# Altium PCB Ryu-Plate.PcbDoc
Units mil, origin at the board's own origin, x right, y up, seen from the top; angles counter-clockwise.
Board outline 6020 x 4528.86 mil, 2 copper layers (Top Layer, Bottom Layer); 34 components, 0 nets, 5 pads, 0 vias.
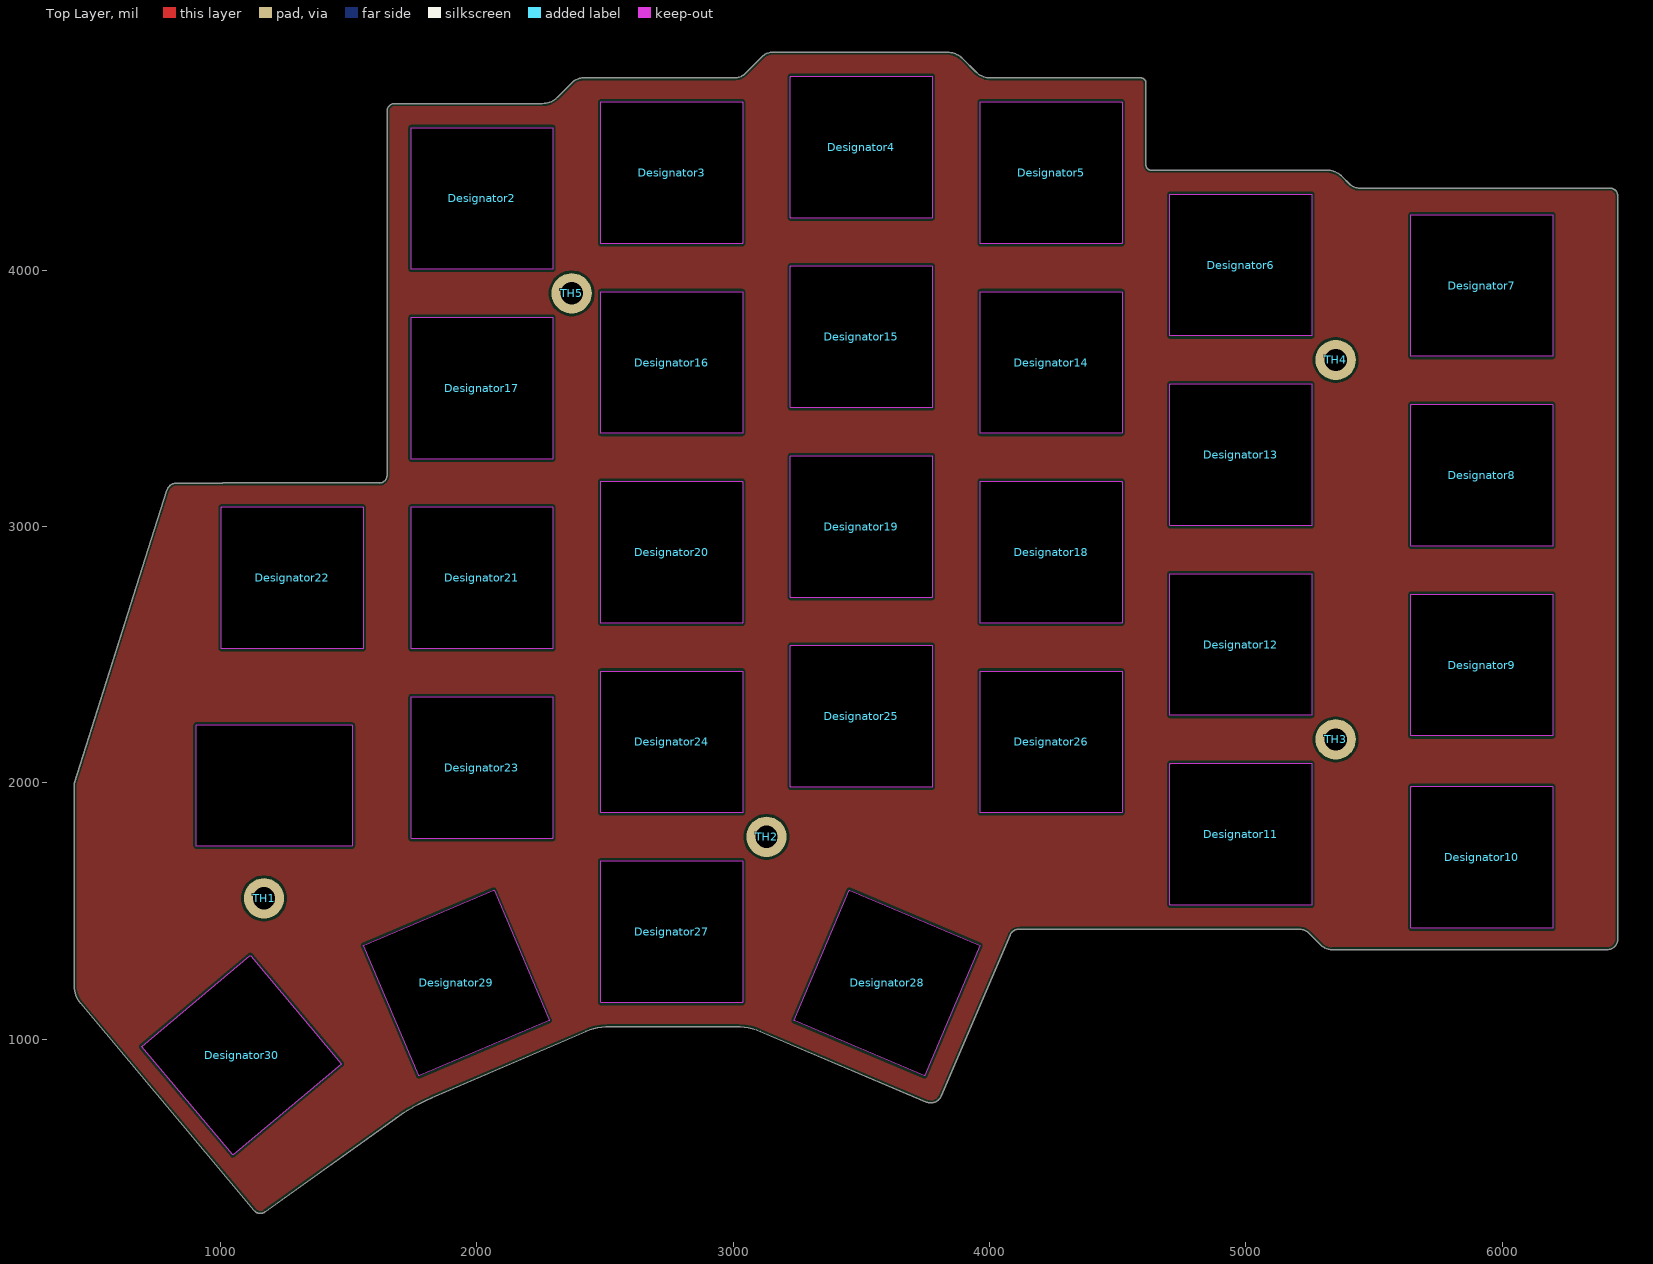
[diagram p0: Top Layer view]
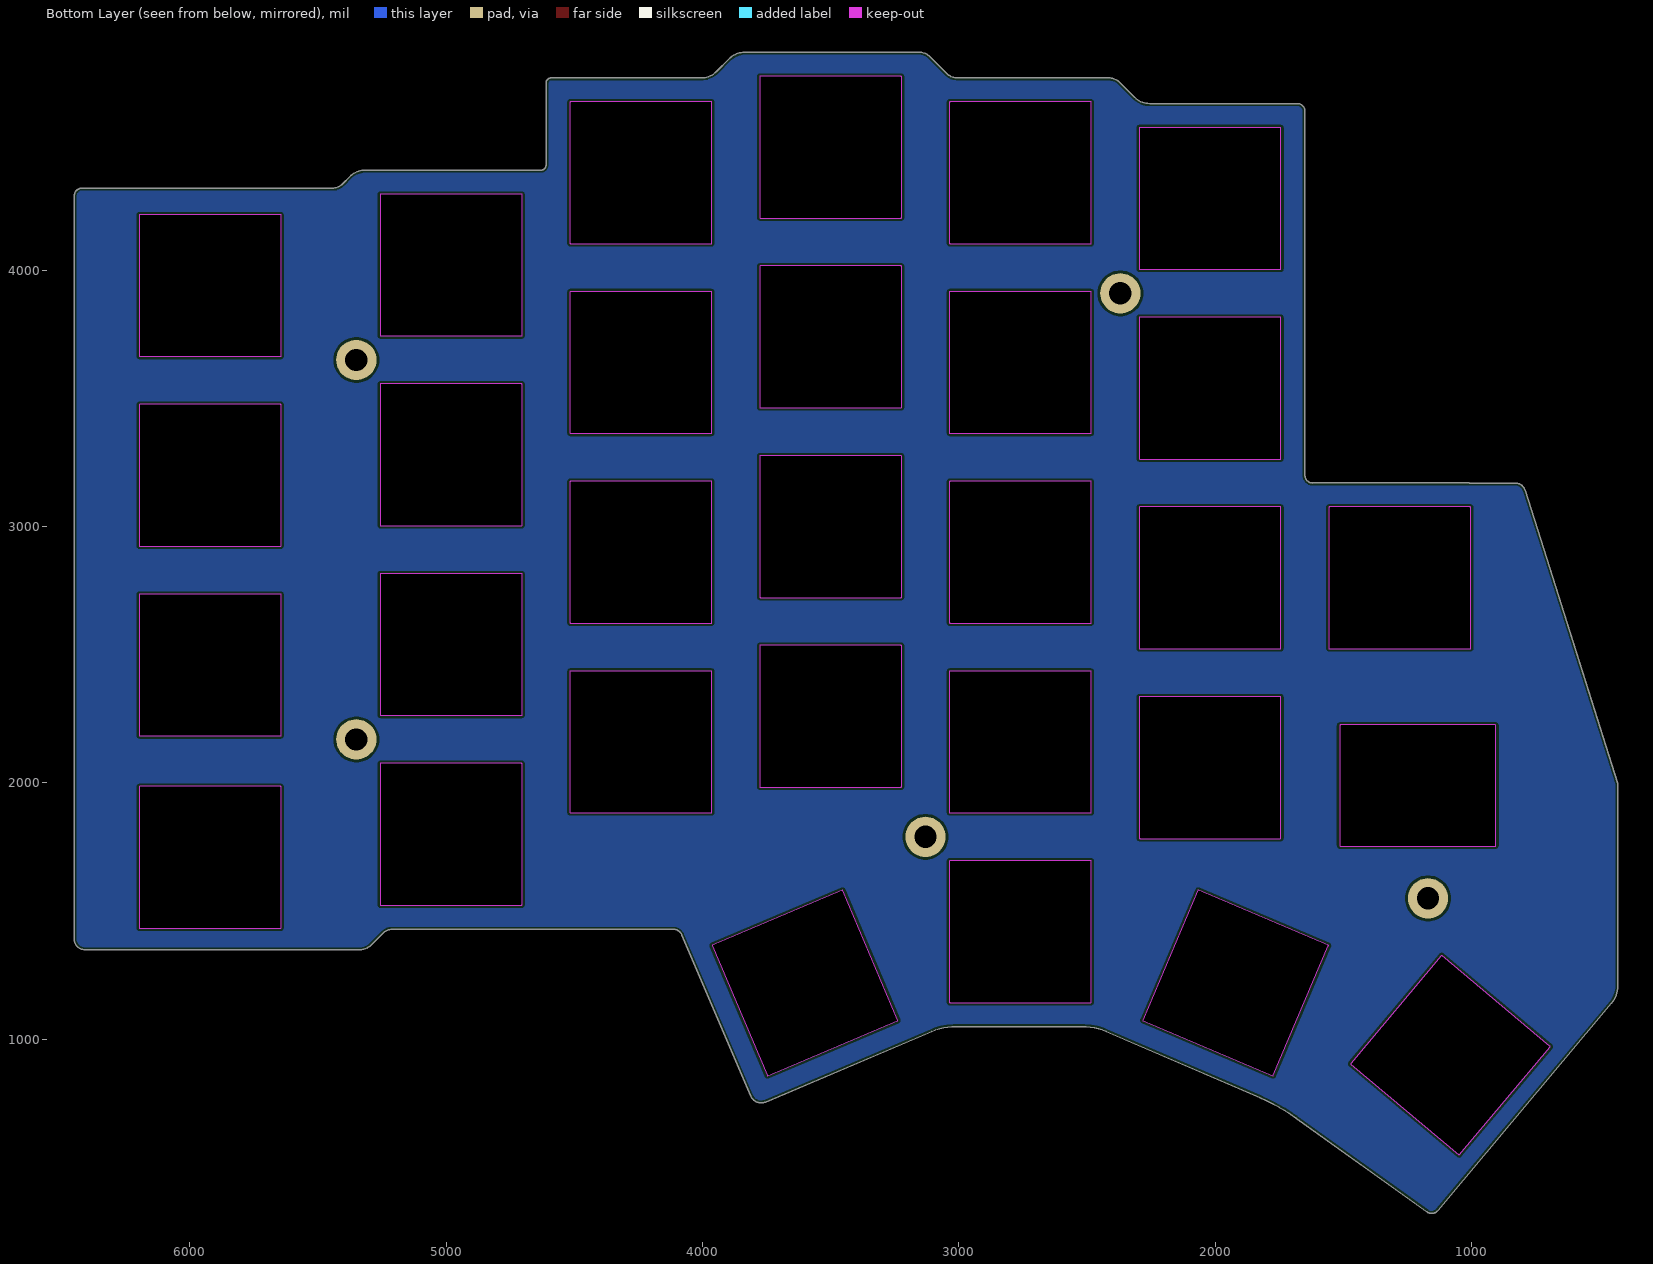
[diagram p1: Bottom Layer view, seen from below]

## Layer stack, top to bottom
Top Solder: solder mask 0.4, Solder Resist, Dk 3.5
Top Layer: signal copper 1.4
Dielectric 1: dielectric 12.6, FR-4, Dk 4.8
Bottom Layer: signal copper 1.4
Bottom Solder: solder mask 0.4, Solder Resist, Dk 3.5

## Board outline
1131.27,332.37 454.09,1141.23 cw(c533.27,1207.52) 430,1207.52 430,1893.38 430,1995.08 cw(c440,1995.03) 430.45,1998 719.24,2913.88 791.15,3141.56 cw(c830,3129.21) 830,3169.98 1008.6,3169.97 1009.29,3170.11 1622.54,3170.11 1620,3170 ccw(c1620,3200) 1650,3200 1650,3199.92 1650,4590 1650,4620 cw(c1680,4620) 1680,4650 2255.86,4650 ccw(c2255.86,4732.42) 2314.14,4674.14 2372.93,4732.93 cw(c2414.14,4691.72) 2414.14,4750 3005.86,4750 ccw(c3005.86,4808.28) 3047.07,4767.07 3112.93,4832.93 cw(c3154.14,4791.72) 3154.14,4850 3835.86,4850 cw(c3835.86,4767.59) 3894.14,4825.86 3945.86,4774.14 ccw(c4004.14,4832.43) 4004.14,4750 4590,4750 cw(c4590,4730) 4610,4730 4610,4410 ccw(c4630,4410) 4630,4390 5315.86,4390 cw(c5315.86,4307.6) 5374.14,4365.85 5374.14,4365.86 5402.93,4337.07 ccw(c5444.14,4378.29) 5444.14,4320 6420,4320 cw(c6420,4290) 6450,4290 6450,1390 cw(c6410,1389.99) 6410,1350 5334.14,1350 cw(c5334.14,1408.28) 5292.93,1367.07 5247.07,1412.93 ccw(c5205.88,1371.75) 5205.86,1430 4620,1430 4115.16,1430 ccw(c4115.16,1391.85) 4080.09,1406.87 3810.75,778.34 cw(c3770.71,795.49) 3753.67,755.4 3105.22,1030.8 ccw(c3010.87,808.65) 3010.87,1050 2518.51,1050 ccw(c2518.51,814.66) 2425.44,1030.81 2425.44,1030.82 1824.45,772.05 ccw(c2121.1,83.05) 1684.12,692.78 1173.72,327 cw(c1155.39,352.57)
cut-out: 1511.97,2226.22 cw(c1511.97,2223.19) 1515,2223.19 1515,1757.13 cw(c1511.65,1757.12) 1511.65,1753.78 907.64,1753.78 cw(c907.64,1756.65) 904.76,1756.65 904.76,2223.66 cw(c907.32,2223.66) 907.32,2226.22

## Design rules (kind name [scope] priority, off if disabled: settings)
BoardOutlineClearance [All] p1: gap=10 ignorepadtopadclearanceinfootprint=FALSE except(0: Arc-SplitContinuation Track-SplitContinuation SMDPad-SplitContinuation THPad-SplitContinuation Via-SplitContinuation Fill-SplitContinuation Poly-SplitContinuation Region-SplitContinuation Text-SplitContinuation)
Clearance [All] p1: gap=10 ignorepadtopadclearanceinfootprint=FALSE except(0: Arc-Hole Track-Hole SMDPad-Hole THPad-Hole Via-Hole Fill-Hole Poly-Hole Region-Hole Text-Hole)
PolygonConnect [All] p1: connectstyle=Relief reliefconductorwidth=10 reliefentries=4 polygonreliefangle="90 Angle" airgapwidth=10
RoutingVias [All] p1: holewidth=28 width=50 viastyle="Through Hole" minholewidth=28 minwidth=50 maxholewidth=28 maxwidth=50
SolderMaskExpansion [All] p1: expansion=4 istentingtop=FALSE
Width [All] p1: maxlimit=10 minlimit=10 preferedwidth=10
30 further rules are at their usual default settings.

## Classes and differential pairs
component class Ryu-Plate: TH1 TH4

## Components (designator, comment, footprint, x,y, rotation, side; value= is the part's Value field where it differs from the comment)
Designator2 "Comment" MX_cutout 2020,4280 r0 top
Designator3 "Comment" MX_cutout 2760,4380 r0 top
Designator4 "Comment" MX_cutout 3500,4480 r0 top
Designator5 "Comment" MX_cutout 4240,4380 r0 top
Designator6 "Comment" MX_cutout 4980,4020 r0 top
Designator7 "Comment" MX_cutout 5920,3940 r0 top
Designator8 "Comment" MX_cutout 5920,3200 r0 top
Designator9 "Comment" MX_cutout 5920,2460 r0 top
Designator10 "Comment" MX_cutout 5920,1710 r0 top
Designator11 "Comment" MX_cutout 4980,1800 r0 top
Designator12 "Comment" MX_cutout 4980,2540 r0 top
Designator13 "Comment" MX_cutout 4980,3280 r0 top
Designator14 "Comment" MX_cutout 4240,3640 r0 top
Designator15 "Comment" MX_cutout 3500,3740 r0 top
Designator16 "Comment" MX_cutout 2760,3640 r0 top
Designator17 "Comment" MX_cutout 2020,3540 r0 top
Designator18 "Comment" MX_cutout 4240,2900 r0 top
Designator19 "Comment" MX_cutout 3500,3000 r0 top
Designator20 "Comment" MX_cutout 2760,2900 r0 top
Designator21 "Comment" MX_cutout 2020,2800 r0 top
Designator22 "Comment" MX_cutout 1280,2800 r0 top
Designator23 "Comment" MX_cutout 2020,2060 r0 top
Designator24 "Comment" MX_cutout 2760,2160 r0 top
Designator25 "Comment" MX_cutout 3500,2260 r0 top
Designator26 "Comment" MX_cutout 4240,2160 r0 top
Designator27 "Comment" MX_cutout 2760,1420 r0 top
Designator28 "Comment" MX_cutout 3600,1220 r337 top
Designator29 "Comment" MX_cutout 1920,1220 r23 top
Designator30 "Comment" MX_cutout 1082.51,938.05 r310 top
TH1 "HOLE_PCB" M2_PCB_HOLE#1 1170,1550 r0 top
TH2 "HOLE_PCB" M2_PCB_HOLE#2 2530,2160 r0 top
TH3 "HOLE_PCB" M2_PCB_HOLE#3 2760,2160 r0 top
TH4 "HOLE_PCB" M2_PCB_HOLE#4 2990,2160 r0 top
TH5 "HOLE_PCB" M2_PCB_HOLE#5 3220,2160 r0 top

## Footprints (in the part's own frame and the unit in brackets; to place one, negate y for a bottom-side part, rotate by r counter-clockwise, add the part's x,y. Pads: shape width x height; smd on the part's side, far side on the other; paste and mask are expansions set on the pad)
M2_PCB_HOLE#1 [mm]
  round 4 hole 2.2: ""(0,0)
M2_PCB_HOLE#2 [mm]
  round 4 hole 2.2: ""(15.24,-9.398)
M2_PCB_HOLE#3 [mm]
  round 4 hole 2.2: ""(65.786,0.254)
M2_PCB_HOLE#4 [mm]
  round 4 hole 2.2: ""(59.944,37.846)
M2_PCB_HOLE#5 [mm]
  round 4 hole 2.2: ""(-21.59,44.45)
MX_cutout [mil]
  Keep-Out Layer board cut-out: -276.57,274.61 -276.42,275.36 -276,276 -275.36,276.42 -274.61,276.57 -274.61,276.57 274.61,276.57 275.36,276.42 276,276 276.42,275.36 276.57,274.61 276.57,274.61 276.57,-274.61 276.42,-275.36 276,-276 275.36,-276.42 274.61,-276.57 274.61,-276.57 -274.61,-276.57 -275.36,-276.42 -276,-276 -276.42,-275.36 -276.57,-274.61 -276.57,-274.61

## Nets (pads, with @x,y where several pads share a name; then routed paths per layer and width w, separated by ;. In a path a pad name is that pad's centre, name@x,y a point inside that pad or via, vN(x,y) a via of type N, cw(c..) or ccw(c..) an arc to the next point about the centre after c; other vN are vias at no path point)
pads on no net: TH1. TH2. TH3. TH4. TH5.

## Polygon pours and split planes (outlines as drawn)
no net on Top Layer "NONET_L-01_P-001" (solid, pour order 0): 380,4900 6510,4900 6510,290 6520,280 360,280
no net on Bottom Layer "NONET_L-01_P-001" (solid, pour order 1): 380,4940 6500,4940 6530,4910 6530,220 440,220 340,320

## Silkscreen, mask and mechanical layers (free items; w line width, h text height)
Board Shape:
  drawing of 336 lines, arcs and shapes, not listed